# Altium PCB shahbazi5v.PcbDoc
Units mm, origin at the board's own origin, x right, y up, seen from the top; angles counter-clockwise.
Board outline 151 x 86.38 mm, 2 copper layers (Top Layer, Bottom Layer); 98 components, 94 nets, 291 pads, 0 vias.
Unrouted connection lines stored in the file: 11.
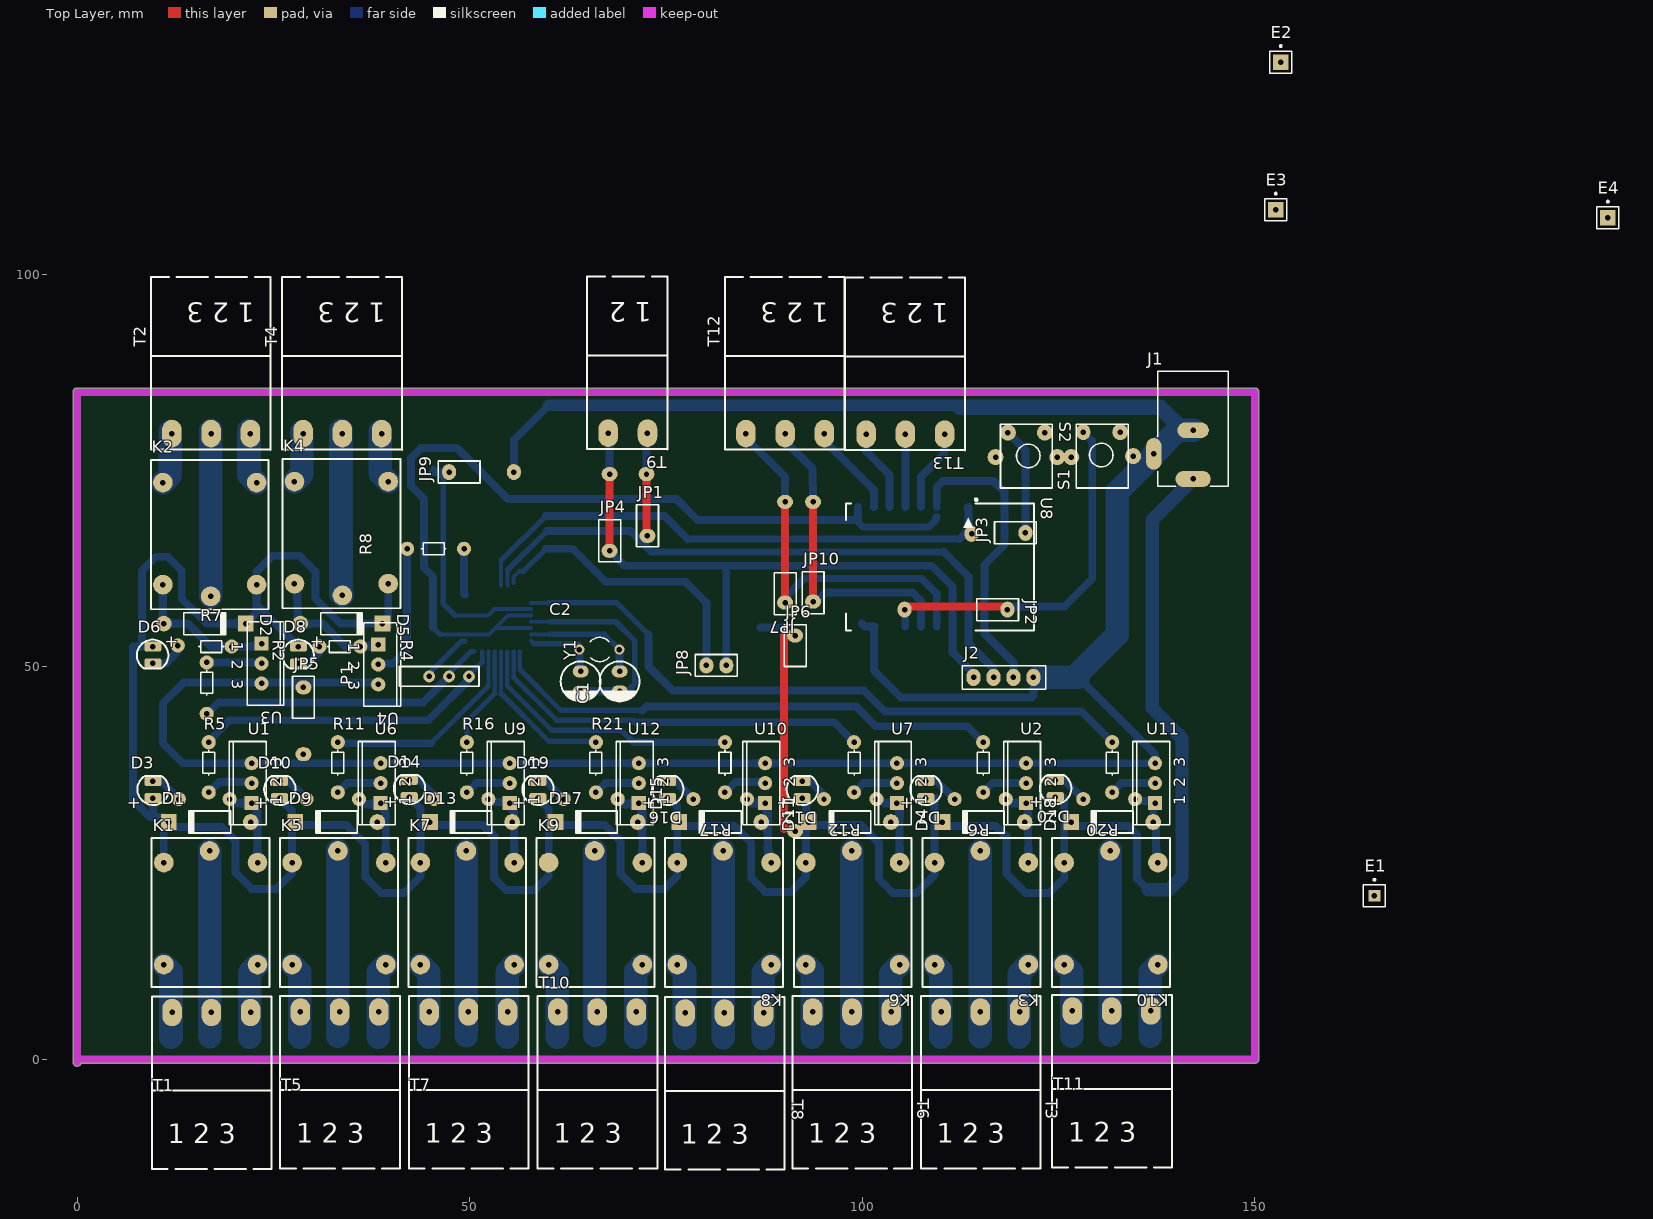
[diagram p0: Top Layer view]
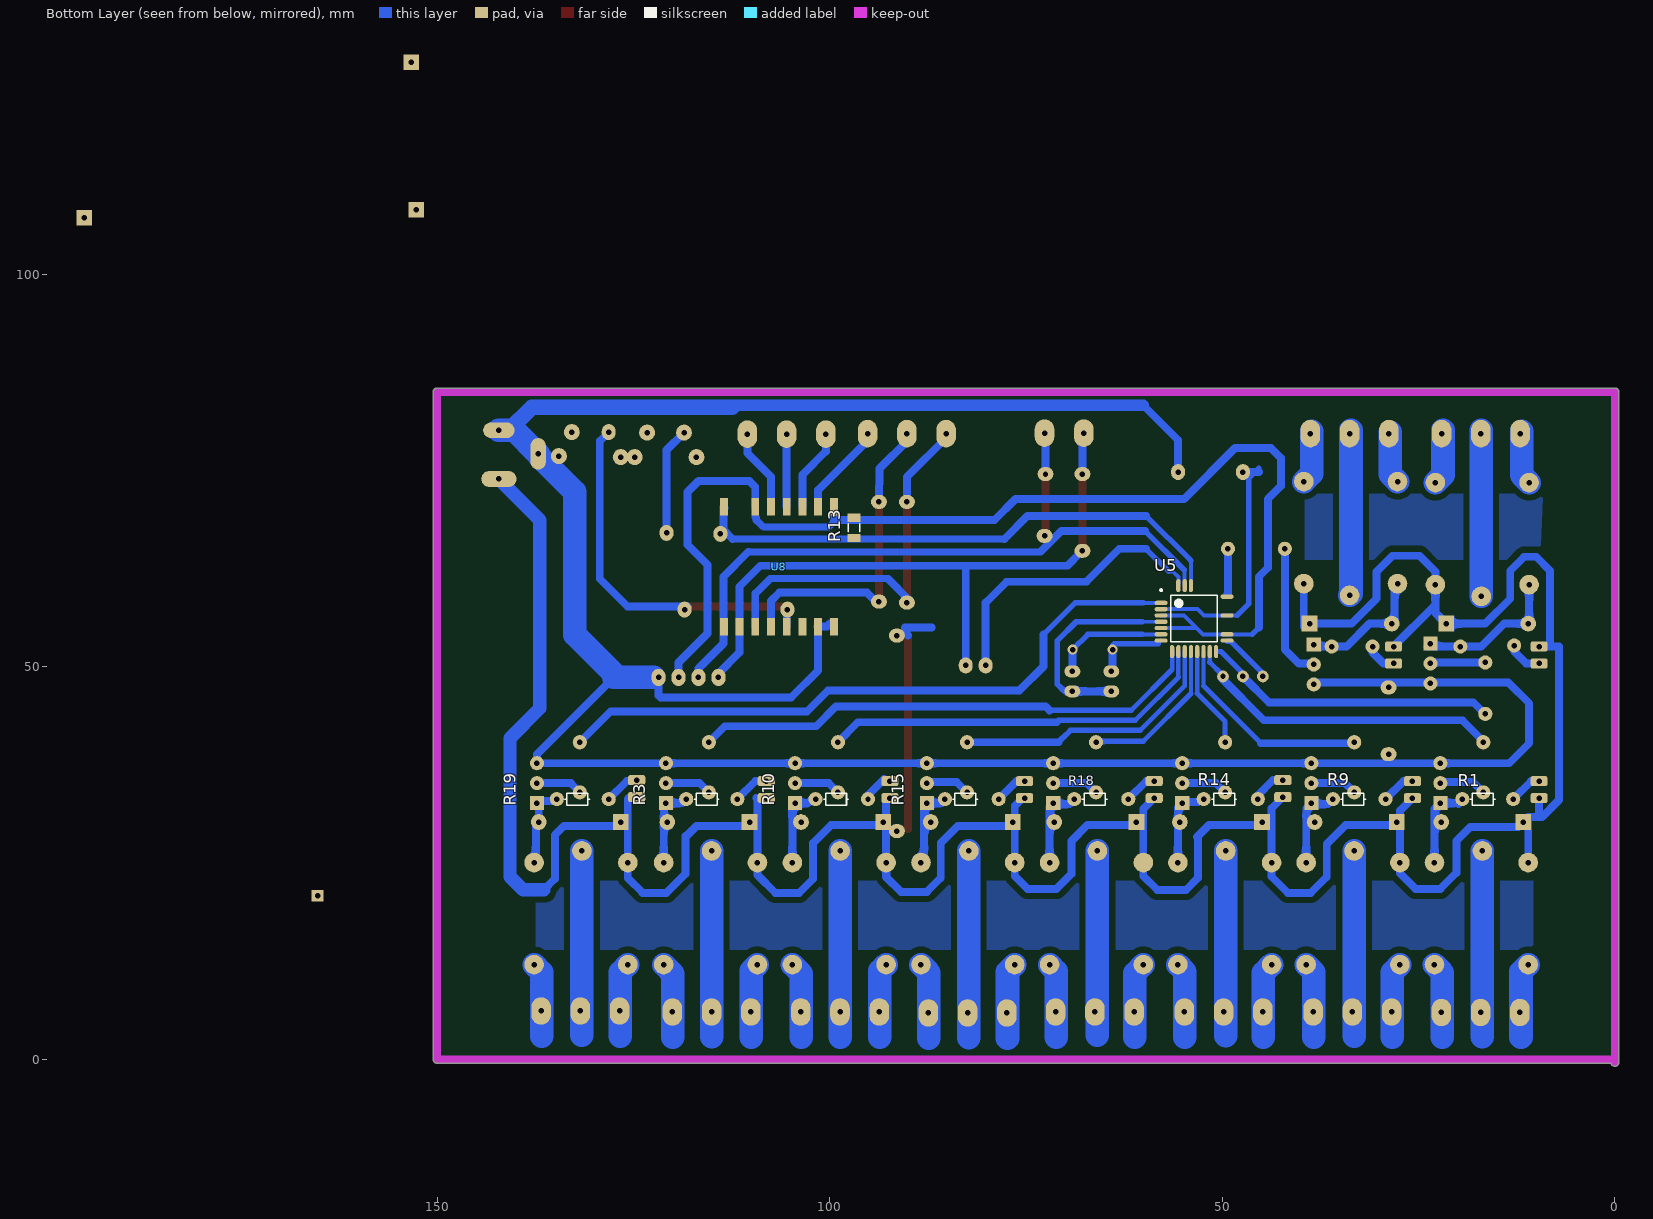
[diagram p1: Bottom Layer view, seen from below]

## Layer stack, top to bottom
Top Solder: solder mask 0.0102, Solder Resist, Dk 3.5
Top Layer: signal copper 0.0356
Dielectric 1: dielectric 0.32, FR-4, Dk 4.8
Bottom Layer: signal copper 0.0356
Bottom Solder: solder mask 0.0102, Solder Resist, Dk 3.5

## Board outline
-0.5,-0.381 -0.5,85 cw(c0,85) 0,85.5 150,85.5 cw(c150,85) 150.5,85 150.5,0 cw(c150,0) 150,-0.5 0.486,-0.5 cw(c0,-0.381)

## Design rules (kind name [scope] priority, off if disabled: settings)
Clearance Clearance_1 [InPolygon] p1: gap=0.8 ignorepadtopadclearanceinfootprint=FALSE
Clearance [All] p2: gap=0.254 ignorepadtopadclearanceinfootprint=FALSE except(0: Arc-Hole Track-Hole SMDPad-Hole THPad-Hole Via-Hole Fill-Hole Poly-Hole Region-Hole Text-Hole)
DiffPairsRouting [All] p1: maxlimit=0.254 minlimit=0.8 mostfreqgap=0.254 toplayer_minwidth=0.381 toplayer_maxwidth=0.381 toplayer_prefwidth=0.381 bottomlayer_minwidth=0.381 bottomlayer_maxwidth=0.381 bottomlayer_prefwidth=0.381 maxuncoupledlength=12.7
PolygonConnect [All] p1: connectstyle=Relief reliefconductorwidth=0.254 reliefentries=4 polygonreliefangle="90 Angle" airgapwidth=0.254
RoomDefinition shahbazi5v [InComponentClass('shahbazi5v')] p1: confinementstyle=ConfineIn formatcopy=TRUE lockcomponents=FALSE outline 144.907,-4.953 247.904,-4.953 247.904,23.114 144.907,23.114
RoutingLayers [All] p1: top layer_v5=FALSE bottom layer_v5=TRUE
RoutingVias [All] p1: holewidth=0.711 width=2.5 viastyle="Through Hole" minholewidth=0.711 minwidth=1.27 maxholewidth=0.711 maxwidth=2
SolderMaskExpansion [All] p1: expansion=0.102 istentingtop=FALSE
Width [All] p1: maxlimit=3 minlimit=0.5 preferedwidth=1
28 further rules are at their usual default settings.

## Components (designator, comment, footprint, x,y, rotation, side; value= is the part's Value field where it differs from the comment)
C1 "Value" ELEC-CAP-RAD10-20 69.088,48.133 r90 top
C2 "Value" ELEC-CAP-RAD10-20 64.135,48.133 r90 top
D1 "Diode 1N4007" DO-41 16.891,30.226 r180 top
D2 "Diode 1N4007" DO-41 16.256,55.499 r0 top
D3 "LED 3mm" LED-3mm 9.779,34.29 r180 top
D4 "Diode 1N4007" DO-41 115.443,30.226 r180 top
D5 "Diode 1N4007" DO-41 33.655,55.499 r0 top
D6 "LED 3mm" LED-3mm 9.525,51.562 r0 top
D7 "LED 3mm" LED-3mm 108.204,34.29 r180 top
D8 "LED 3mm" LED-3mm 28.067,51.562 r0 top
D9 "Diode 1N4007" DO-41 33.02,30.226 r180 top
D10 "LED 3mm" LED-3mm 25.908,34.29 r180 top
D11 "Diode 1N4007" DO-41 98.425,30.226 r180 top
D12 "LED 3mm" LED-3mm 92.456,34.29 r180 top
D13 "Diode 1N4007" DO-41 50.165,30.226 r180 top
D14 "LED 3mm" LED-3mm 42.418,34.417 r180 top
D15 "Diode 1N4007" DO-41 81.915,30.226 r180 top
D16 "LED 3mm" LED-3mm 75.311,34.29 r180 top
D17 "Diode 1N4007" DO-41 66.167,30.226 r180 top
D18 "Diode 1N4007" DO-41 131.826,30.226 r180 top
D19 "LED 3mm" LED-3mm 58.801,34.29 r180 top
D20 "LED 3mm" LED-3mm 124.714,34.417 r180 top
E1 "Antenna" PIN1#1 165.227,20.828 r0 top
E2 "Antenna" PIN1#2 153.289,127 r0 top
E3 "Antenna" PIN1#2 152.654,108.204 r0 top
E4 "Antenna" PIN1#2 194.95,107.188 r0 top
J1 "PWR2.5" KLD-0202 142.133,87.614 r270 top
J2 "Header4X1" "HEADER 4X1" 114.173,48.641 r0 top
JP1 "Jumper" "Header 2X1"#1 72.644,67.945 r90 top
JP2 "Jumper" "Header 2X1"#2 117.221,57.277 r0 top
JP3 "Jumper" "Header 2X1"#3 119.507,67.056 r180 top
JP4 "Jumper" "Header 2X1"#4 67.818,66.04 r90 top
JP5 "Jumper" "Header 2X1"#5 28.829,46.101 r90 top
JP6 "Jumper" "Header 2X1"#6 91.44,52.705 r90 top
JP7 "Jumper" "Header 2X1"#7 90.17,59.309 r270 top
JP8 "Jumper" "Header 2X1"#8 81.407,50.165 r180 top
JP9 "Jumper" "Header 2X1"#9 48.641,74.803 r180 top
JP10 "Jumper" "Header 2X1"#10 93.726,59.436 r90 top
K1 "Relay-12vDC" Relays#1 24.501,28.194 r180 top
K2 "Relay-12vDC" Relays#1 9.398,57.325 r0 top
K3 "Relay-12vDC" Relays#1 122.665,28.194 r180 top
K4 "Relay-12vDC" Relays#1 26.162,57.452 r0 top
K5 "Relay-12vDC" Relays#1 40.842,28.194 r180 top
K6 "Relay-12vDC" Relays#1 106.282,28.194 r180 top
K7 "Relay-12vDC" Relays#1 57.182,28.194 r180 top
K8 "Relay-12vDC" Relays#1 89.899,28.194 r180 top
K9 "Relay-12vDC" Relays#2 73.523,28.194 r180 top
K10 "Relay-12vDC" Relays#1 139.175,28.194 r180 top
P1 "Header 4" HDR1X4 49.911,48.768 r180 top
R1 "Res2" Res50#1 18.034,33.147 r0 bottom value=1K
R2 "Res2" Res50#2 18.288,52.578 r0 top value=1K
R3 "Res2" Res50#3 116.876,33.147 r0 bottom value=1K
R4 "Res2" Res50#4 34.671,52.578 r0 top value=1K
R5 "Res2" Res50#5 16.764,36.576 r270 top value=1K
R6 "Res2" Res50#5 115.389,36.576 r270 top
R7 "Res2" Res50#6 16.51,49.149 r90 top
R8 "Res2" Res50#7 44.196,65.024 r180 top
R9 "Res2" Res50#8 34.508,33.147 r0 bottom value=1K
R10 "Res2" Res50#9 100.403,33.147 r0 bottom value=1K
R11 "Res2" Res50#5 33.201,36.576 r270 top value=1K
R12 "Res2" Res50#5 98.951,36.576 r270 top
R13 "10K" "RES 1206 (3216X08L)" 96.901,67.691 r90 bottom
R14 "Res2" Res50#10 50.981,33.147 r0 bottom value=1K
R15 "Res2" Res50#11 83.929,33.147 r0 bottom value=1K
R16 "Res2" Res50#5 49.639,36.576 r270 top value=1K
R17 "Res2" Res50#5 82.514,36.576 r270 top value=1K
R18 "Res2" Res50#12 67.455,33.147 r0 bottom value=1K
R19 "Res2" Res50#13 133.35,33.147 r0 bottom value=1K
R20 "Res2" Res50#5 131.826,36.576 r270 top
R21 "Res2" Res50#5 66.076,36.576 r270 top
S1 "PUSH BUTTON DOUBLE" "PUSH BUTTON"#1 130.556,76.835 r90 top
S2 "PUSH BUTTON DOUBLE" "PUSH BUTTON"#2 120.904,76.835 r270 top
T1 "Terminal" "phoenix terminal R 3" 9.525,-13.97 r0 top
T2 "Terminal" "phoenix terminal R 3" 24.645,99.631 r180 top
T3 "Terminal" "phoenix terminal R 3" 107.465,-13.906 r0 top
T4 "Terminal" "phoenix terminal R 3" 41.362,99.631 r180 top
T5 "Terminal" "phoenix terminal R 3" 25.86,-13.906 r0 top
T6 "Terminal" "phoenix terminal R 3" 91.115,-13.906 r0 top
T7 "Terminal" "phoenix terminal R 3" 42.258,-13.906 r0 top
T8 "Terminal" "phoenix terminal R 3" 74.859,-14.033 r0 top
T9 "Phoenix terminal" "phoenix terminal R 2" 75.217,99.695 r180 top
T10 "Terminal" "phoenix terminal R 3" 58.657,-13.906 r0 top
T11 "Terminal" "phoenix terminal R 3" 124.182,-13.779 r0 top
T12 "Terminal" "phoenix terminal R 3" 97.743,99.631 r180 top
T13 "Terminal" "phoenix terminal R 3" 113.063,99.568 r180 top
U1 "L4931CV30" TO-220A 22.225,35.179 r90 top
U2 "L4931CV30" TO-220A 120.85,35.179 r90 top
U3 "L4931CV30" TO-220A 23.495,50.419 r270 top
U4 "L4931CV30" TO-220A 38.354,50.292 r270 top
U5 "ATmega8-16AC" 32A_N 53.594,56.134 r180 bottom
U6 "L4931CV30" TO-220A 38.662,35.179 r90 top
U7 "L4931CV30" TO-220A 104.412,35.179 r90 top
U8 "ESP_12_E" ESP_12_E 113.474,70.733 r270 top
U9 "L4931CV30" TO-220A 55.1,35.179 r90 top
U10 "L4931CV30" TO-220A 87.63,35.179 r90 top
U11 "L4931CV30" TO-220A 137.287,35.179 r90 top
U12 "L4931CV30" TO-220A 71.537,35.179 r90 top
Y1 "XTAL" R38 66.548,52.197 r90 top

## Footprints (in the part's own frame and the unit in brackets; to place one, negate y for a bottom-side part, rotate by r counter-clockwise, add the part's x,y. Pads: shape width x height; smd on the part's side, far side on the other; paste and mask are expansions set on the pad)
32A_N [mm] "Thin QFP, 32-Leads, Body 7x7mm, Pitch 0.8mm, IPC Medium Density"
  oval 1.65x0.55 smd: 2(-4.2,2) 3(-4.2,1.2) 4(-4.2,0.4) 5(-4.2,-0.4) 6(-4.2,-1.2) 7(-4.2,-2) 8(-4.2,-2.8) 17(4.2,-2.8) 18(4.2,-2) 21(4.2,0.4) 24(4.2,2.8)
  oval 0.55x1.65 smd: 9(-2.8,-4.2) 10(-2,-4.2) 11(-1.2,-4.2) 12(-0.4,-4.2) 13(0.4,-4.2) 14(1.2,-4.2) 15(2,-4.2) 16(2.8,-4.2) 29(-0.4,4.2) 30(-1.2,4.2) 31(-2,4.2)
  silkscreen extent -4.33,-2.95 2.95,3.75, body extent -3.5,-3.5 3.5,3.5, height 1.2
DO-41 [mm] "Diode, Axial; Body 5.2 x 2.7 mm (LxDia. max), Lead Dia. 0.86 mm (max)"
  round 2 hole 0.7: 1(-5.23,0)
  rect 2x2 hole 0.7: 2(5.23,0)
  silkscreen extent -2.65,-1.4 2.75,1.4
ELEC-CAP-RAD10-20 [mil]
  oval 60x80 hole 27.56: 1(-50,0) 2(50,0)
  silkscreen extent -100,-100 100,100, body extent -124,-124 124,124, height 404
ESP_12_E [mm] "ESP-12 Wi-Fi Module by AI-Thinker"
  rect 2.25x1 smd far side: 1(0.375,0) 3(0.375,-4) 4(0.375,-6) 5(0.375,-8) 6(0.375,-10) 7(0.375,-12) 8(0.375,-14) 15(15.625,-14) 16(15.625,-12) 17(15.625,-10) 18(15.625,-8) 19(15.625,-6) 20(15.625,-4) 21(15.625,-2) 22(15.625,0)
  silkscreen extent -0.7,-15.57 16.08,8.37, body extent 0,-15.49 16,8.51, height 2.75
HDR1X4 [mm] "Connector; Header; 4 Position"
  round 1.5 hole 0.7: 1(0,0) 2(2.54,0) 3(5.08,0)
  silkscreen extent -1.27,-1.27 8.89,1.27
"Header 2X1"#1 [mil]
  oval 70x80 hole 27.56: 1(-50,0) 2(260,5)
  silkscreen extent -105,-55 105,55, body extent -100,-50 100,50, height 374
"Header 2X1"#2 [mil]
  oval 70x80 hole 27.56: 1(-466.14,0) 2(50,0)
  silkscreen extent -105,-55 105,55, body extent -100,-50 100,50, height 374
"Header 2X1"#3 [mil]
  oval 70x80 hole 27.56: 1(-50,0) 2(220,5)
  silkscreen extent -105,-55 105,55, body extent -100,-50 100,50, height 374
"Header 2X1"#4 [mil]
  oval 70x80 hole 27.56: 1(-50,0) 2(335,0)
  silkscreen extent -105,-55 105,55, body extent -100,-50 100,50, height 374
"Header 2X1"#5 [mil]
  oval 70x80 hole 27.56: 1(-285,0) 2(50,0)
  silkscreen extent -105,-55 105,55, body extent -100,-50 100,50, height 374
"Header 2X1"#6 [mil]
  oval 70x80 hole 27.56: 1(-930,0) 2(50,0)
  silkscreen extent -105,-55 105,55, body extent -100,-50 100,50, height 374
"Header 2X1"#7 [mil]
  oval 70x80 hole 27.56: 1(-460.28,0) 2(45,0)
  silkscreen extent -105,-55 105,55, body extent -100,-50 100,50, height 374
"Header 2X1"#8 [mil]
  oval 70x80 hole 27.56: 1(-50,0) 2(50,0)
  silkscreen extent -105,-55 105,55, body extent -100,-50 100,50, height 374
"Header 2X1"#9 [mil]
  oval 70x80 hole 27.56: 1(-275,0) 2(50,0)
  silkscreen extent -105,-55 105,55, body extent -100,-50 100,50, height 374
"Header 2X1"#10 [mil]
  oval 70x80 hole 27.56: 1(455.28,0) 2(-45,0)
  silkscreen extent -105,-55 105,55, body extent -100,-50 100,50, height 374
"HEADER 4X1" [mm]
  oval 1.8x2.2 hole 0.7: 1(0,0) 2(2.54,0) 3(5.08,0) 4(7.62,0)
  silkscreen extent -1.43,-1.5 9.18,1.5, body extent -1.19,-1.22 8.97,1.32, height 8.38
KLD-0202 [mm] "DC Power Jack, 2.5mm, KLD Series, PCB Mount"
  oval 2x4.5 hole 0.7: 1(13.7,0)
  round 1.5 all layers, no hole: 1A(13.7,-1.25) 1B(13.7,1.25) 2A(7.5,-1) 2B(7.5,1) 3A(9.5,-5) 3B(11.5,-5)
  oval 2x4 hole 0.7: 2(7.5,0)
  oval 4x2 hole 0.7: 3(10.5,-5)
  silkscreen extent 0,-4.5 14.6,4.5
LED-3mm [mm] "LED; 2 Leads"
  rrect50% 2.2x1.3 hole 0.7: 1(0.127,1.016) 2(0.127,-1.143)
  silkscreen extent -1.9,-1.81 2.09,1.89
"phoenix terminal R 2" [mm] "2 Right terminals"
  oval 2.5x3.5 hole 0.7: 1(2.573,19.939) 2(7.573,19.939)
  silkscreen extent 0,0 10.29,22
"phoenix terminal R 3" [mm] "3 Right terminals"
  oval 2.5x3.5 hole 0.7: 1(2.573,19.939) 2(7.573,19.939) 3(12.573,19.939)
  silkscreen extent 0,0 15.24,22
PIN1#1 [mm] "Generic Antenna; 1 Lead"
  rect 1.5x1.5 hole 0.7: 1(0,0)
  silkscreen extent -1.4,-1.4 1.4,2.17
PIN1#2 [mm] "Generic Antenna; 1 Lead"
  rect 2x2 hole 0.7: 1(0,0)
  silkscreen extent -1.4,-1.4 1.4,2.17
"PUSH BUTTON"#1 [mil]
  oval 80x70 hole 27.56: 1(120,95)
  round 80 hole 27.56: 2(-5,155) 3(0,-155) 4(120,-90)
  silkscreen extent -160,-130 160,130, body extent -155,-121 157,123, height 205
"PUSH BUTTON"#2 [mil]
  round 80 hole 27.56: 1(-117.5,92.5) 2(5,155) 3(-117.5,-92.5) 4(5,-155)
  silkscreen extent -160,-130 160,130, body extent -155,-121 157,123, height 205
R38 [mm] "Crystal, Thru-Hole; 2 Leads; Body 3.1 x 8.2 mm (Dia.xH)"
  round 1.3 hole 0.7: 1(0,2.566) 2(0,-2.514)
  silkscreen extent -1.55,-1.19 1.55,1.17
Relays#1 [mm]
  round 2.5 hole 0.7: 1(7.62,1.651) 2(1.524,16.129) 3(13.462,16.129) 4(1.524,3.127) 5(13.462,3.127)
  silkscreen extent 0,0 15,19
Relays#2 [mm]
  round 2.5 hole 0.7: 1(7.62,1.651) 2(1.524,16.129) 3(13.462,16.129) 4(1.524,3.127)
  round 2.5 all layers, no hole: 5(13.462,3.127)
  silkscreen extent 0,0 15,19
Res50#1 [mm] "50mm Pin Spacing"
  round 1.8 hole 0.7: 1(-5.08,0) 2(1.397,0)
  silkscreen extent -2.77,-0.76 0.38,0.76
Res50#2 [mm] "50mm Pin Spacing"
  round 1.8 hole 0.7: 1(-5.461,0.127) 2(1.397,0)
  silkscreen extent -2.77,-0.76 0.38,0.76
Res50#3 [mm] "50mm Pin Spacing"
  round 1.8 hole 0.7: 1(-5.116,0) 2(1.397,0)
  silkscreen extent -2.77,-0.76 0.38,0.76
Res50#4 [mm] "50mm Pin Spacing"
  round 1.8 hole 0.7: 1(-3.81,0) 2(1.397,0)
  silkscreen extent -2.77,-0.76 0.38,0.76
Res50#5 [mm] "50mm Pin Spacing"
  round 1.8 hole 0.7: 1(-3.81,0) 2(2.576,0)
  silkscreen extent -2.77,-0.76 0.38,0.76
Res50#6 [mm] "50mm Pin Spacing"
  round 1.8 hole 0.7: 1(-5.149,0) 2(1.397,0)
  silkscreen extent -2.77,-0.76 0.38,0.76
Res50#7 [mm] "50mm Pin Spacing"
  round 1.8 hole 0.7: 1(-5.08,0) 2(2.159,0)
  silkscreen extent -2.77,-0.76 0.38,0.76
Res50#8 [mm] "50mm Pin Spacing"
  round 1.8 hole 0.7: 1(-5.298,0) 2(1.397,0)
  silkscreen extent -2.77,-0.76 0.38,0.76
Res50#9 [mm] "50mm Pin Spacing"
  round 1.8 hole 0.7: 1(-5.28,0) 2(1.397,0)
  silkscreen extent -2.77,-0.76 0.38,0.76
Res50#10 [mm] "50mm Pin Spacing"
  round 1.8 hole 0.7: 1(-5.515,0) 2(1.397,0)
  silkscreen extent -2.77,-0.76 0.38,0.76
Res50#11 [mm] "50mm Pin Spacing"
  round 1.8 hole 0.7: 1(-5.443,0) 2(1.397,0)
  silkscreen extent -2.77,-0.76 0.38,0.76
Res50#12 [mm] "50mm Pin Spacing"
  round 1.8 hole 0.7: 1(-5.479,0) 2(1.397,0)
  silkscreen extent -2.77,-0.76 0.38,0.76
Res50#13 [mm] "50mm Pin Spacing"
  round 1.8 hole 0.7: 1(-5.207,0) 2(1.397,0)
  silkscreen extent -2.77,-0.76 0.38,0.76
"RES 1206 (3216X08L)" [mm] "Chip Resistor, 2-Leads, Body 3.2x1.6mm, IPC High Density _ (0.125 W)"
  rect 1.05x1.7 smd: 1(-1.295,0) 2(1.301,0)
  silkscreen extent -0.5,-0.75 0.5,0.75, body extent -1.52,-0.76 1.53,0.76, height 0.6
TO-220A [mm] "TO, Thru-Hole, Vertical, Heatsink Mounted; 3 In-Line Leads; Pitch 2.54 mm"
  rect 1.8x1.8 hole 0.7: 1(-2.54,0)
  round 1.8 hole 0.7: 2(0,0) 3(2.54,0)
  silkscreen extent -5.3,-1.85 5.3,2.85

## Part data
C1 C2: library part "Capacitor Electrolytic", "Electrolytic Capacitor"
D1 D2 D4 D5 D9 D11 D13 D15 D17 D18: "1 Amp General Purpose Rectifier", Code_JEDEC=DO-204-AL, ComponentLink1Description="Manufacturer Link", ComponentLink1URL=http://www.fairchildsemi.com/, ComponentLink2Description=Datasheet, ComponentLink2URL=http://www.fairchildsemi.com/ds/1N%2F1N4001.pdf, DatasheetVersion=1998, LatestRevisionDate=17-Jul-2002, LatestRevisionNote="Re-released for DXP Platform.", PackageDescription="Diode, Axial; Body 5.2 x 2.7 mm (LxDia. max), Lead Dia. 0.86 mm (max)", PackageReference=DO-41, PackageVersion=Aug-1999, Published=8-Jun-2000, Publisher="Altium Limited"
D3 D6 D7 D8 D10 D12 D14 D16 D19 D20: "Typical LED", Designer="Seyed Mohsen Ghasemian", PackageDescription="LED; 2 Leads", PackageReference=LED, Published=02/04/2012, Publisher=www.picpars.com
E1 E2 E3 E4: "Generic Antenna", LatestRevisionDate=17-Jul-2002, LatestRevisionNote="Re-released for DXP Platform.", PackageReference=PIN1, Published=24-Mar-1999, Publisher="Altium Limited"
J1: "Low Voltage Power Supply Connector", ComponentLink1Description="Manufacturer Link", ComponentLink1URL=http://domino.kycon.com/internet/Products.html, DatasheetDocument=09-May-2002, Published=17-Dec-2003, Publisher="Altium Limited"
K1 K2 K3 K4 K5 K6 K7 K8 K9 K10: library part Relay-05vDC, "Relay-05vDC-240AC 5A", ComponentLinkURL=www.picpars.com, Designer="Seyed Mohsen Ghasemain"
P1: "Header, 4-Pin", LatestRevisionDate=17-Jul-2002, LatestRevisionNote="Re-released for DXP Platform.", Publisher="Altium Limited"
R1 R2 R3 R4 R5 R6 R7 R8 R9 R10 R11 R12 R14 R15 R16 R17 R18 R19 R20 R21: "Resistor", LatestRevisionDate=17-Jul-2002, LatestRevisionNote="Re-released for DXP Platform.", PackageDescription="Axial Device, Thru-Hole; 2 Leads; 0.4 in Pin Spacing", Published=8-Jun-2000, Publisher="Altium Limited"
  R1 R2 R3 R4 R5 R6 R7 R8 R9 R10 R11 R12 R15 R16 R17 R18 R19 R20 R21: PackageReference=AXIAL-0.4
  R14: PackageReference=Res50
R13: library part Resistor, "Resistor", Power="1/4 W", Tolerance=5%
S1 S2: "Switch"
T1 T2 T3 T4 T5 T6 T7 T8 T10 T11: library part "Terminal 1*3", "phoenix terminal R 3", ComponentLinkURL=www.picpars.com, Designer="Seyed Mohsen Ghasemain", E-mail=picpars@gmail.com
T9: library part "Phoenix terminal R 2", "Right Terminal 2 Pin", ComponentLinkURL=www.picpars.com, Designer="Seyed Mohsen Ghasemain", E-mail=picpars@gmail.com
T12 T13: library part "Terminal 1*3", "Terminal 3 Pin 250VAC 16A", ComponentLinkURL=www.picpars.com, Designer="Seyed Mohsen Ghasemain", E-mail=picpars@gmail.com
U1 U2 U3 U4 U6 U7 U9 U10 U11 U12: "250mA, Very Low Drop ( 0.4V) Voltage Regulator", ComponentLink1Description="Manufacturer Link", ComponentLink1URL=http://www.st.com/, ComponentLink2Description=Datasheet, ComponentLink2URL=http://www.st.com/stonline/products/literature/ds/4340/l4931abxx15.pdf, DatasheetVersion=Apr-1999, LatestRevisionDate=06-Jun-2005, LatestRevisionNote="PCB Pin sequence re-ordered.", PackageDescription="TO, Thru-Hole, Vertical, Heatsink Mounted; 3 In-Line Leads; Pitch 2.54 mm", PackageReference=TO-220A, PackageVersion=Jul-2004, Published=24-Aug-2001, Publisher="Altium Limited"
U5: "8-Bit AVR Microcontroller with 8K Bytes of In-System Programmable Flash Memory", Supplier Part Number 1=ATMEGA8-16AC-ND, Code_JEDEC=MS-026-ABA, ComponentLink1Description=Datasheet, ComponentLink1URL=http://www.atmel.com/dyn/resources/prod_documents/doc2486.pdf, ComponentLink2Description="Atmel.com Home", ComponentLink2URL=http://www.atmel.com, DatasheetVersion=2486H-AVR-09/02, LatestRevisionDate=16-Oct-2006, LatestRevisionNote="IPC-7351 Footprint Added.", PackageDescription="32-Lead, 7x7x1.0 mm Body, 0.8mm Lead Pitch, Thin Profile Plastic Quad Flat Package (TQFP)", PackageReference=32A, PackageVersion="revB, Oct-2001", Published=17-Sep-2003, Publisher="Altium Limited", Supplier 1=Digi-Key, Supplier 2=Mouser, Supplier Part Number 2=556-ATMEGA8-16AC
U8: "ESP-12 Wi-Fi Module by AI-Thinker", IC=ESP8266-EX, Vendor=Ai-thinker
Y1: "Crystal Oscillator", LatestRevisionDate=17-Jul-2002, LatestRevisionNote="Re-released for DXP Platform.", PackageDescription="Crystal, Thru-Hole; 2 Leads; Body 3.1 x 8.2 mm (Dia.xH)", PackageReference=R38, Published=8-Jun-2000, Publisher="Altium Limited"

## Nets (pads, with @x,y where several pads share a name; then routed paths per layer and width w, separated by ;. In a path a pad name is that pad's centre, name@x,y a point inside that pad or via, vN(x,y) a via of type N, cw(c..) or ccw(c..) an arc to the next point about the centre after c; other vN are vias at no path point)
ADC: 
btn: JP2.1 JP2.2 S1.1 U8.18 | length 46.7
  Top Layer w1: JP2.1@105.283,57.658 JP2.2@118.11,57.658
  Bottom Layer w1: U8.18 JP2.1@105.474,57.213 ; JP2.2@118.11,57.658 125.73,57.658 129.286,61.214 129.286,78.74 S1.1
GND: C1.1 C2.1 E1.1 E2.1 J1.2 J1.2A J1.2B J1.3 J1.3A J1.3B J2.4 JP5.1 JP5.2 JP9.1 JP9.2 S1.3 S1.4 S2.1 S2.2 U1.3 U2.3 U3.3 U4.3 U5.3 U5.5 U5.21 U6.3 U7.3 U8.15 U8.16 U9.3 U10.3 U11.3 U12.3 | length 403.2
  Bottom Layer w0.5: 48.114,56.534 U5.21 49.413,56.515 52.324,56.515 53.143,57.334 U5.3 ; U5.5 60.198,55.734
  Bottom Layer w0.7: 45.339,75.311 45.847,74.803 46.609,74.041 46.609,58.039 48.114,56.534 ; 60.198,55.734 68.599,55.734 70.993,53.34 70.993,47.752 70.104,46.863 C1.1
  Bottom Layer w1: U4.3 38.1,48.006 13.589,48.006 10.922,45.339 10.922,40.259 13.462,37.719 U1.3 U6.3 U9.3 U12.3 U10.3 U7.3 U2.3 U11.3 137.287,38.862 127.508,48.641 ; 45.339,74.803 45.847,74.803 JP9.2 ; JP9.1 55.626,78.867 60.071,83.312 ; C2.1 C1.1 ; U8.15@99.962,55.499 100.33,55.131 U8.16@101.538,55.131 ; U8.16 101.474,49.529 104.902,46.101 121.539,46.101 121.793,46.355 J2.4@121.793,48.387 ; J2.4 J2.4@121.793,48.387 ; J2.4@122.174,48.768 J2.4@121.793,48.387
  Bottom Layer w1.5: 60.071,83.312 112.141,83.312 112.395,83.058
  Bottom Layer w2: 112.395,83.058 137.922,83.058 J1.2A@140.866,80.114
  Bottom Layer w3: J2.4@122.428,48.641 127,48.641 ; 127.508,48.641 127,48.641 ; J1.3B@136.993,76.795 132.461,72.263 132.461,54.102 127,48.641 ; J1.3 140.133,80.114 140.866,80.114 J1.2A J1.2
i2: 
i3: 
i4: 
i5: 
i6: 
i8: JP7.1 JP7.2 T12.3 U8.20 | length 49.9
  Top Layer w1: JP7.2@90.17,58.42 JP7.1
  Bottom Layer w0.7: T12.3@84.9,79.692 85.035,79.557 T12.3@85.09,79.502
  Bottom Layer w0.9: 92.583,61.214 107.569,61.214
  Bottom Layer w1: T12.3 85.035,79.557 84.836,79.358 85.09,79.104 85.09,79.248 90.17,74.168 JP7.1 ; JP7.2@89.852,58.483 92.583,61.214 ; 107.569,61.214 109.474,59.309 U8.20
i9: T12.1 U8.7 | length 11.8
  Bottom Layer w0.7: T12.1@94.996,78.994 T12.1@94.996,79.502
  Bottom Layer w1: T12.1@94.996,78.994 101.474,72.516 U8.7
i10: JP10.1 JP10.2 T12.2 U8.19 | length 39.8
  Top Layer w1: JP10.2@93.726,58.42 JP10.1
  Bottom Layer w1: T12.2@90.043,78.803 93.662,75.251 JP10.1@93.701,71 ; JP10.2 94.107,58.293 95.25,59.436 106.426,59.436 107.474,58.388 U8.19
i11: T13.2 U8.5 | length 9.3
  Bottom Layer w1: U8.5 105.49,70.374 T13.2
i12: T13.1 U8.4 | length 10.5
  Bottom Layer w1: U8.4 107.474,74.2 110.49,77.216 T13.1
i13: T13.3 U8.6 | length 10.5
  Bottom Layer w1: T13.3 100.49,77.437 103.474,74.453 U8.6
led: U8.17
NetC1_2: C1.2 U5.7 Y1.2 | length 14.9
  Bottom Layer w0.5: U5.7 60.198,54.134
  Bottom Layer w0.7: 60.198,54.134 67.125,54.134 Y1.2
  Bottom Layer w1: Y1.2 69.062,49.429 C1.2
NetC2_2: C2.2 U5.8 Y1.1 | length 9.8
  Bottom Layer w0.5: U5.8 58.169,52.959 ; Y1.1 Y1.1@63.982,52.725
  Bottom Layer w0.7: 58.169,52.959 63.748,52.959 Y1.1@63.982,52.725
  Bottom Layer w1: Y1.1 63.982,49.556 C2.2
NetD1_1: D1.1 K1.4 R1.2 U1.1 | length 11.1
  Bottom Layer w1: R1.2 19.431,33.02 19.939,32.512 20.066,32.639 U1.1 22.977,31.887 K1.4
NetD2_1: D2.1 K2.4 R2.2 U3.1 | length 19
  Bottom Layer w1: D2.1@10.922,55.499 K2.4 ; D2.1 14.097,55.499 17.018,52.578 R2.2 U3.1@23.876,52.578
NetD3_2: D3.2 R1.1 | length 4.2
  Bottom Layer w1: D3.2 10.668,35.433 R1.1
NetD4_1: D4.1 K3.4 R3.2 U2.1 | length 10.5
  Bottom Layer w1: R3.2 118.781,32.639 U2.1 121.141,32.348 K3.4
NetD5_1: D5.1 K4.4 R4.2 U4.1 | length 16.3
  Bottom Layer w1: D5.1@28.067,55.753 K4.4@28.067,60.833 ; D5.1 31.242,55.499 34.163,52.578 R4.2 38.1,52.578 U4.1
NetD6_2: D6.2 R2.1 | length 4.1
  Bottom Layer w1: D6.2@10.16,50.419 11.303,50.419 12.827,51.943 R2.1
NetD7_2: D7.2 R3.1 | length 3.4
  Bottom Layer w1: 109.347,35.433 109.474,35.433 R3.1
NetD8_2: D8.2 R4.1 | length 4
  Bottom Layer w1: D8.2 29.464,50.419 30.861,51.816 R4.1
NetD9_1: D9.1 K5.4 R9.2 U6.1 | length 10.9
  Bottom Layer w1: R9.2 36.54,32.512 38.535,32.512 U6.1 39.318,31.984 K5.4
NetD10_2: D10.2 R9.1 | length 4.4
  Bottom Layer w1: D10.2 26.924,35.433 R9.1
NetD11_1: D11.1 K6.4 R10.2 U7.1 | length 10.5
  Bottom Layer w1: R10.2 102.235,33.147 102.743,32.639 U7.1 104.758,32.293 K6.4
NetD12_2: D12.2 R10.1 | length 3.6
  Bottom Layer w1: D12.2@93.091,35.433 93.091,35.687 95.123,33.655 R10.1
NetD13_1: D13.1 K7.4 R14.2 U9.1 | length 10.7
  Bottom Layer w1: R14.2 52.705,33.147 53.086,32.766 54.973,32.766 U9.1 55.658,32.08 K7.4
NetD14_2: D14.2 R14.1 | length 4.5
  Bottom Layer w1: D14.2 43.561,35.56 45.466,33.655 R14.1
NetD15_1: D15.1 K8.4 R15.2 U10.1 | length 10.7
  Bottom Layer w1: R15.2 85.725,32.748 85.725,32.639 U10.1 87.975,32.639 87.975,25.467 K8.4
NetD16_2: D16.2 R15.1 | length 4.2
  Bottom Layer w1: D16.2 76.2,35.433 R15.1
NetD17_1: D17.1 K9.4 R18.2 U12.1 | length 10.8
  Bottom Layer w1: R18.2 69.469,32.53 69.469,32.512 71.41,32.512 U12.1 71.999,32.177 K9.4
NetD18_1: D18.1 K10.4 R19.2 U11.1 | length 10.3
  Bottom Layer w1: R19.2@135.255,33.147 135.255,32.893 137.033,32.893 U11.1 137.056,32.408 D18.1 137.414,29.868 137.414,25.304 K10.4
NetD19_2: D19.2 R18.1 | length 4.2
  Bottom Layer w1: D19.2 59.69,35.433 R18.1
NetD20_2: D20.2 R19.1 | length 3.5
  Bottom Layer w1: D20.2@125.603,35.433 125.857,35.433 R19.1
NetK1_1: K1.1 T1.2 | length 23.9
  Bottom Layer w2: 16.881,2.874 16.961,2.794 ; K1.1 K1.1@16.881,26.67
  Bottom Layer w3: 16.881,2.874 K1.1
NetK1_2: K1.2 T1.3 | length 9.8
  Bottom Layer w2: K1.2 K1.2@22.977,12.192
  Bottom Layer w3: 21.961,2.794 21.961,11.049 K1.2
NetK1_3: K1.3 T1.1 | length 9.8
  Bottom Layer w2: K1.3 K1.3@11.039,12.192
  Bottom Layer w3: K1.3 11.961,11.143 11.961,2.794
NetK2_1: K2.1 T2.2 | length 21.2
  Bottom Layer w3: K2.1 T2.2@17.018,80.137
NetK2_2: K2.2 T2.3 | length 7
  Bottom Layer w3: K2.2 11.891,74.423 T2.3@11.891,80.01
NetK2_3: K2.3 T2.1 | length 7.1
  Bottom Layer w3: T2.1@21.891,80.137 21.891,74.423 K2.3
NetK3_1: K3.1 T3.2 | length 23.8
  Bottom Layer w2: 114.965,2.794 115.045,2.874
  Bottom Layer w3: 115.045,2.874 K3.1
NetK3_2: K3.2 T3.3 | length 9.8
  Bottom Layer w3: 119.965,2.794 119.965,10.889 K3.2
NetK3_3: K3.3 T3.1 | length 9.6
  Bottom Layer w3: K3.3 109.965,11.303 109.965,2.794
NetK4_1: K4.1 T4.2 | length 21.1
  Bottom Layer w3: T4.2@33.608,80.137 33.608,59.277 K4.1
NetK4_2: K4.2 T4.3 | length 6.7
  Bottom Layer w3: K4.2 28.608,74.503 T4.3@28.608,79.883
NetK4_3: K4.3 T4.1 | length 6.8
  Bottom Layer w3: T4.1@38.608,80.01 38.608,74.597 K4.3
NetK5_1: K5.1 T5.2 | length 23.9
  Bottom Layer w2: 33.222,2.932 33.36,2.794 ; K5.1 K5.1@33.222,26.67
  Bottom Layer w3: 33.222,2.932 K5.1
NetK5_2: K5.2 T5.3 | length 9.8
  Bottom Layer w2: K5.2 K5.2@39.318,12.192
  Bottom Layer w3: 38.36,2.794 38.36,11.107 K5.2
NetK5_3: K5.3 T5.1 | length 9.8
  Bottom Layer w2: K5.3 K5.3@27.38,12.192
  Bottom Layer w3: K5.3 28.36,11.085 28.36,2.794
NetK6_1: K6.1 T6.2 | length 23.8
  Bottom Layer w2: 98.615,2.794 98.662,2.841
  Bottom Layer w3: 98.662,2.841 K6.1
NetK6_2: K6.2 T6.3 | length 9.7
  Bottom Layer w3: 103.615,2.794 103.615,10.922 K6.2
NetK6_3: K6.3 T6.1 | length 9.6
  Bottom Layer w3: K6.3 93.615,11.27 93.615,2.794
NetK7_1: K7.1 T7.2 | length 24
  Bottom Layer w2: 49.562,2.99 49.758,2.794 ; K7.1 K7.1@49.562,26.67
  Bottom Layer w3: 49.562,2.99 K7.1
NetK7_2: K7.2 T7.3 | length 9.8
  Bottom Layer w2: K7.2 K7.2@55.658,12.192
  Bottom Layer w3: 54.758,2.794 54.758,11.165 K7.2
NetK7_3: K7.3 T7.1 | length 9.8
  Bottom Layer w2: K7.3 K7.3@43.72,12.192
  Bottom Layer w3: K7.3 44.758,11.027 44.758,2.794
NetK8_1: K8.1 T8.2 | length 23.9
  Bottom Layer w2: 82.279,2.747 82.359,2.667
  Bottom Layer w3: 82.279,2.747 K8.1
NetK8_2: K8.2 T8.3 | length 9.8
  Bottom Layer w3: 87.359,2.667 87.359,11.049 K8.2
NetK8_3: K8.3 T8.1 | length 9.8
  Bottom Layer w3: K8.3 77.359,11.143 77.359,2.667
NetK9_1: K9.1 T10.2 | length 24
  Bottom Layer w2: 65.903,3.048 66.157,2.794 ; K9.1 K9.1@65.903,26.67
  Bottom Layer w3: 65.903,3.048 K9.1
NetK9_2: K9.2 T10.3 | length 9.7
  Bottom Layer w2: K9.2 K9.2@71.999,12.192
  Bottom Layer w3: 71.157,2.794 71.157,11.223 K9.2
NetK9_3: K9.3 T10.1 | length 9.9
  Bottom Layer w2: K9.3 K9.3@60.061,12.192
  Bottom Layer w3: K9.3 61.157,10.969 61.157,2.794
NetK10_1: K10.1 T11.2 | length 23.7
  Bottom Layer w2: 131.555,3.048 131.682,2.921
  Bottom Layer w3: 131.555,3.048 K10.1
NetK10_2: K10.2 T11.3 | length 9.5
  Bottom Layer w3: 136.682,2.921 136.682,11.096 K10.2
NetK10_3: K10.3 T11.1 | length 9.5
  Bottom Layer w3: K10.3 126.682,11.096 126.682,2.921
NetR5_2: R5.2 U1.2 | length 6.1
  Bottom Layer w1: R5.2 18.07,35.306 22.098,35.306 U1.2
NetR6_2: R6.2 U2.2 | length 5.9
  Bottom Layer w1: R6.2 116.568,35.179 U2.2
NetR7_2: R7.2 U3.2 | length 7
  Bottom Layer w1: R7.2 U3.2@23.495,50.546
NetR8_2: R8.2 U4.2 | length 17.5
  Bottom Layer w1: U4.2@38.227,50.165 U4.2 38.481,50.419 40.259,50.419 42.037,52.197 R8.2
NetR11_2: R11.2 U6.2 | length 5.9
  Bottom Layer w1: R11.2 34.38,35.179 U6.2
NetR12_2: R12.2 U7.2 | length 5.9
  Bottom Layer w1: R12.2 100.13,35.179 U7.2
NetR16_2: R16.2 U9.2 | length 5.9
  Bottom Layer w1: R16.2 50.818,35.179 U9.2
NetR17_2: R17.2 U10.2 | length 6.1
  Bottom Layer w1: R17.2 83.82,35.306 87.848,35.306 U10.2@87.975,35.179
NetR20_2: R20.2 U11.2 | length 6
  Bottom Layer w1: R20.2@131.953,34.163 132.969,35.179 U11.2 U11.2@137.541,35.179
NetR21_2: R21.2 U12.2 | length 5.9
  Bottom Layer w1: R21.2 67.255,35.179 U12.2
O1: R20.1 U5.2 | length 83.8
  Bottom Layer w0.5: U5.2 60.071,58.134
  Bottom Layer w0.7: 60.071,58.134 68.739,58.134 72.771,54.102
  Bottom Layer w1: 72.771,54.102 72.771,50.038 75.819,46.99 100.203,46.99 102.87,44.323 127.889,44.323 R20.1
O2: R6.1 U5.9 | length 65.5
  Bottom Layer w0.55: 56.394,49.651 U5.9
  Bottom Layer w0.65: 56.394,49.651 61.595,44.45
  Bottom Layer w0.7: 61.595,44.45 72.009,44.45
  Bottom Layer w1: 72.009,44.45 72.517,44.958 99.187,44.958 101.727,42.418 113.357,42.418 R6.1
O3: R12.1 U5.10 | length 50.1
  Bottom Layer w0.55: 55.594,48.673 U5.10
  Bottom Layer w0.65: 55.594,48.673 61.087,43.18
  Bottom Layer w0.7: 61.087,43.18 70.866,43.18 71.12,42.926
  Bottom Layer w1: 71.12,42.926 96.411,42.926 R12.1
o4: R17.1 U5.11 | length 35.1
  Bottom Layer w0.55: 54.794,47.568 U5.11
  Bottom Layer w0.65: 54.794,47.568 60.452,41.91
  Bottom Layer w0.7: 60.452,41.91 69.342,41.91 70.866,40.386
  Bottom Layer w1: 70.866,40.386 R17.1
o5: R21.1 U5.12 | length 20
  Bottom Layer w0.55: 53.994,46.59 U5.12
  Bottom Layer w0.65: 53.994,46.59 60.071,40.513
  Bottom Layer w0.7: 60.071,40.513 65.949,40.513 R21.1
o6: R16.1 U5.13 | length 13
  Bottom Layer w0.55: 53.194,46.59 U5.13
  Bottom Layer w0.65: R16.1 49.639,43.035 53.194,46.59
o7: R11.1 U5.14 | length 26.6
  Bottom Layer w0.55: 52.394,47.568 U5.14
  Bottom Layer w0.65: 45.085,40.259 52.394,47.568
  Bottom Layer w1: R11.1 33.328,40.259 45.085,40.259
o8: P1.1 R5.1 U5.15 | length 40.4
  Bottom Layer w0.55: 51.594,50.578 U5.15
  Bottom Layer w0.65: P1.1@50.038,49.022 51.594,50.578
  Bottom Layer w1: R5.1 16.764,40.513 19.431,43.18 44.704,43.18 P1.1@50.102,48.578
o9: P1.2 R7.1 U5.16 | length 36.5
  Bottom Layer w0.65: P1.2@47.498,49.276 50.156,51.934 U5.16@50.546,51.934
  Bottom Layer w0.7: P1.2@47.498,49.022 P1.2@47.498,49.276
  Bottom Layer w1: R7.1@17.018,44.45 18.034,45.466 44.069,45.466 47.18,48.578 P1.2@47.18,48.831
o10: P1.3 U5.17 | length 6.3
  Bottom Layer w0.7: P1.3@44.958,49.022 44.958,49.276 48.937,53.255 U5.17@49.394,53.255
o11: R8.1 U5.24 | length 5.9
  Bottom Layer w1: R8.1 49.276,59.281 U5.24@49.394,59.163
rst: JP3.1 JP3.2 R13.1 S2.3 U5.29 U8.1 | length 83.6
  Bottom Layer w0.5: U5.29 53.994,63.519
  Bottom Layer w0.7: 53.994,63.519 59.69,69.215
  Bottom Layer w0.9: 77.724,66.294 112.395,66.294
  Bottom Layer w1: 59.69,69.215 74.803,69.215 77.724,66.294 ; 112.395,66.294 113.538,67.437 113.538,70.358 U8.1@113.411,70.231 ; S2.3 120.777,77.597 JP3.1
rst2: 
rx: J2.1 JP4.1 JP4.2 JP8.1 JP8.2 T9.2 U5.31 U8.21 | length 123.6
  Top Layer w1: JP4.1 JP4.2
  Bottom Layer w0.5: U5.31@55.615,60.903 55.615,60.692 55.598,60.675 55.598,61.44 56.325,62.166
  Bottom Layer w0.62: 56.325,62.166 56.832,62.166
  Bottom Layer w0.7: 56.832,62.166 59.69,65.024
  Bottom Layer w0.9: 69.723,62.865 82.677,62.865 108.839,62.865
  Bottom Layer w1: 59.69,65.024 63.119,65.024 67.31,60.833 77.47,60.833 80.137,58.166 JP8.2 ; T9.2 67.818,79.582 JP4.2 ; JP4.1@68.008,64.579 69.723,62.865 ; JP8.1 82.677,62.865 ; 108.839,62.865 111.506,60.198 111.506,51.816 114.173,49.149 J2.1
rx2: J2.2 JP1.1 JP1.2 T9.1 U5.30 U8.22 | length 92.5
  Top Layer w1: JP1.1@72.517,66.675 JP1.2
  Bottom Layer w0.5: U5.30 54.794,62.287 54.864,62.357
  Bottom Layer w0.7: 54.864,62.357 59.817,67.31
  Bottom Layer w0.9: 73.152,64.643 110.363,64.643
  Bottom Layer w1: 59.817,67.31 70.485,67.31 73.152,64.643 ; JP1.2 72.517,79.629 T9.1 ; 110.363,64.643 113.538,61.468 113.538,52.959 116.713,49.784 J2.2
vcc: D1.2 D2.2 D3.1 D4.2 D5.2 D6.1 D7.1 D8.1 D9.2 D10.1 D11.2 D12.1 D13.2 D14.1 D15.2 D16.1 D17.2 D18.2 D19.1 D20.1 E4.1 J1.1 J1.1A J1.1B JP6.1 JP6.2 K1.5 K2.5 K3.5 K4.5 K5.5 K6.5 K7.5 K8.5 K9.5 K10.5 | length 445.7
  Top Layer w1: 90.043,29.337 90.043,53.975
  Bottom Layer w1: D3.1 9.652,30.861 9.665,30.848 ; D6.1 8.255,52.578 ; K1.5 D1.2@11.039,30.848 ; D10.1 27.38,31.675 K5.5 27.38,23.697 25.4,21.717 22.225,21.717 20.193,23.749 20.193,27.813 18.415,29.591 12.296,29.591 D1.2 D1.2@11.039,30.848 ; D9.2 28.171,29.845 34.29,29.845 36.703,27.432 36.703,23.241 38.735,21.209 41.656,21.209 43.72,23.273 K7.5 43.72,31.972 D14.1 ; D8.1 23.114,57.658 22.86,57.658 ; D5.2 33.528,55.499 30.353,58.674 30.353,62.103 28.321,64.135 24.892,64.135 22.86,62.103 K2.5 22.86,57.658 ; D5.2@39.624,55.118 K4.5 ; D13.2 45.316,29.845 51.689,29.845 53.213,28.321 53.086,28.194 53.086,23.114 54.61,21.59 58.293,21.59 60.061,23.358 K9.5 60.061,31.887 D19.1 ; D17.2 61.318,29.845 67.183,29.845 69.215,27.813 69.215,23.622 71.12,21.717 74.803,21.717 76.437,23.351 K8.5 76.437,32.275 D16.1@75.438,33.274 ; D15.2 77.193,29.718 83.693,29.718 85.852,27.559 85.852,23.114 87.63,21.336 90.932,21.336 92.82,23.224 K6.5 92.82,29.035 ; 87,54.991 90.424,54.991 90.215,54.434 90.043,53.975 ; JP6.1 92.772,29.083 92.82,29.035 ; D12.1@92.82,33.003 92.82,29.035 ; D11.2 93.576,29.845 99.822,29.845 102.108,27.559 102.108,22.987 103.886,21.209 106.934,21.209 109.203,23.478 K3.5 109.203,33.13 109.347,33.274 ; D4.2 110.721,29.718 116.967,29.718 118.237,28.448 118.364,28.448 118.364,23.622 120.777,21.209 123.825,21.209 125.713,23.097 K10.5 125.713,33.164 D20.1@125.603,33.274 ; D18.2 127.104,29.718 133.858,29.718 135.001,28.575 135.001,22.987 136.398,21.59 ; 8.255,52.578 8.255,62.23 10.033,64.008 11.557,64.008 13.335,62.23 13.335,58.674 16.51,55.499 D2.2 22.86,56.873 22.86,57.658 ; 8.255,52.578 7.112,52.578 7.112,33.02 9.284,30.848 9.665,30.848 ; 9.665,30.848 D1.2@11.039,30.848
  Bottom Layer w1.7: 136.398,21.59 139.065,21.59 140.716,23.241 140.716,40.894 136.906,44.704 136.906,68.687 J1.1
vdd: E3.1 J2.3 R13.2 U5.4 U5.6 U5.18 U8.3 U8.8 | length 153.1
  Bottom Layer w0.5: 46.196,54.134 U5.18 52.483,54.134 53.34,54.991 ; U5.6 53.397,54.934 53.34,54.991 ; U5.4 54.883,56.534 53.34,54.991
  Bottom Layer w0.7: 45.339,54.991 46.196,54.134
  Bottom Layer w0.9: 99.474,68.42 100.076,67.818 108.458,67.818 109.347,68.707
  Bottom Layer w1: 45.339,54.991 45.339,61.468 44.196,62.611 44.196,71.374 42.545,73.025 42.545,76.581 43.815,77.851 48.387,77.851 54.864,71.374 76.327,71.374 78.994,68.707 96.901,68.707 99.474,68.707 99.474,69.723 U8.8 ; 109.347,68.707 109.347,68.961 109.474,69.088 ; U8.3 109.474,72.898 110.236,73.66 116.713,73.66 118.11,72.263 118.11,65.532 115.57,62.992 115.57,54.229 119.253,50.546 J2.3
pads on no net: S1.2 S2.4

## Polygon pours and split planes (outlines as drawn)
no net on Bottom Layer "Bottom Layer-No Net" (solid, pour order 10): 9.144,72.009 39.624,72.009 39.878,71.755 39.497,71.374 39.497,63.627 9.652,63.627 9.525,63.754
no net on Bottom Layer "Bottom Layer-No Net" (solid, pour order 8): 10.414,22.733 137.414,22.733 137.414,13.97 10.414,13.97

## Keep-outs
Keep-Out Layer:
  lines w1: 0,-0.381 0,85 150,85 150,0 0,0

## Text inside footprints (layer, text, board x,y; h text height)
D3: Top Overlay "+" at 6.604,33.528 h1.52 r270
D6: Top Overlay "+" at 12.7,52.324 h1.52 r90
D7: Top Overlay "+" at 105.029,33.528 h1.52 r270
D8: Top Overlay "+" at 31.242,52.324 h1.52 r90
D10: Top Overlay "+" at 22.733,33.528 h1.52 r270
D12: Top Overlay "+" at 89.281,33.528 h1.52 r270
D14: Top Overlay "+" at 39.243,33.655 h1.52 r270
D16: Top Overlay "+" at 72.136,33.528 h1.52 r270
D19: Top Overlay "+" at 55.626,33.528 h1.52 r270
D20: Top Overlay "+" at 121.539,33.655 h1.52 r270
J1: Mechanical 1 "Alert PCB fab to slot details" at 148.199,87.328 h0.3 r270; Mechanical 1 "Assign keep-out area to slot" at 148.699,87.328 h0.3 r270; Mechanical 1 "Mech 1 - Slot cut-out" at 147.699,87.328 h0.3 r270; Mechanical 1 "Mech 2 - Clearance, move to internal plane if present" at 147.199,87.328 h0.3 r270
T1: Top Overlay "1 2 3" at 11.557,-10.668 h2.5
T2: Top Overlay "1 2 3" at 22.613,96.329 h2.5 r180
T3: Top Overlay "1 2 3" at 109.497,-10.604 h2.5
T4: Top Overlay "1 2 3" at 39.33,96.329 h2.5 r180
T5: Top Overlay "1 2 3" at 27.892,-10.604 h2.5
T6: Top Overlay "1 2 3" at 93.147,-10.604 h2.5
T7: Top Overlay "1 2 3" at 44.29,-10.604 h2.5
T8: Top Overlay "1 2 3" at 76.891,-10.731 h2.5
T9: Top Overlay "1 2" at 73.185,96.393 h2.5 r180
T10: Top Overlay "1 2 3" at 60.689,-10.604 h2.5
T11: Top Overlay "1 2 3" at 126.214,-10.477 h2.5
T12: Top Overlay "1 2 3" at 95.711,96.329 h2.5 r180
T13: Top Overlay "1 2 3" at 111.031,96.266 h2.5 r180
U1: Top Overlay "1" at 26.05,32.389 h1.5 r90; Top Overlay "2" at 26.05,34.679 h1.5 r90; Top Overlay "3" at 26.05,37.219 h1.5 r90
U2: Top Overlay "1" at 124.675,32.389 h1.5 r90; Top Overlay "2" at 124.675,34.679 h1.5 r90; Top Overlay "3" at 124.675,37.219 h1.5 r90
U3: Top Overlay "3" at 19.67,48.379 h1.5 r270; Top Overlay "2" at 19.67,50.919 h1.5 r270; Top Overlay "1" at 19.67,53.209 h1.5 r270
U4: Top Overlay "3" at 34.529,48.252 h1.5 r270; Top Overlay "2" at 34.529,50.792 h1.5 r270; Top Overlay "1" at 34.529,53.082 h1.5 r270
U6: Top Overlay "1" at 42.487,32.389 h1.5 r90; Top Overlay "2" at 42.487,34.679 h1.5 r90; Top Overlay "3" at 42.487,37.219 h1.5 r90
U7: Top Overlay "1" at 108.237,32.389 h1.5 r90; Top Overlay "2" at 108.237,34.679 h1.5 r90; Top Overlay "3" at 108.237,37.219 h1.5 r90
U8: Mechanical 13 "ANTENNA AREA" at 121.348,70.606 h0.25 r270; Mechanical 13 "CUTOUT POLYGON" at 120.84,70.606 h0.25 r270
U9: Top Overlay "1" at 58.925,32.389 h1.5 r90; Top Overlay "2" at 58.925,34.679 h1.5 r90; Top Overlay "3" at 58.925,37.219 h1.5 r90
U10: Top Overlay "1" at 91.455,32.389 h1.5 r90; Top Overlay "2" at 91.455,34.679 h1.5 r90; Top Overlay "3" at 91.455,37.219 h1.5 r90
U11: Top Overlay "1" at 141.112,32.389 h1.5 r90; Top Overlay "2" at 141.112,34.679 h1.5 r90; Top Overlay "3" at 141.112,37.219 h1.5 r90
U12: Top Overlay "1" at 75.362,32.389 h1.5 r90; Top Overlay "2" at 75.362,34.679 h1.5 r90; Top Overlay "3" at 75.362,37.219 h1.5 r90